# Altium PCB Mez.PcbDoc
Units mm, origin at the board's own origin, x right, y up, seen from the top; angles counter-clockwise.
Board outline 71.75 x 95 mm, 2 copper layers (Top Layer, Bottom Layer); 6 components, 40 nets, 152 pads, 0 vias.
Unrouted connection lines stored in the file: 3.
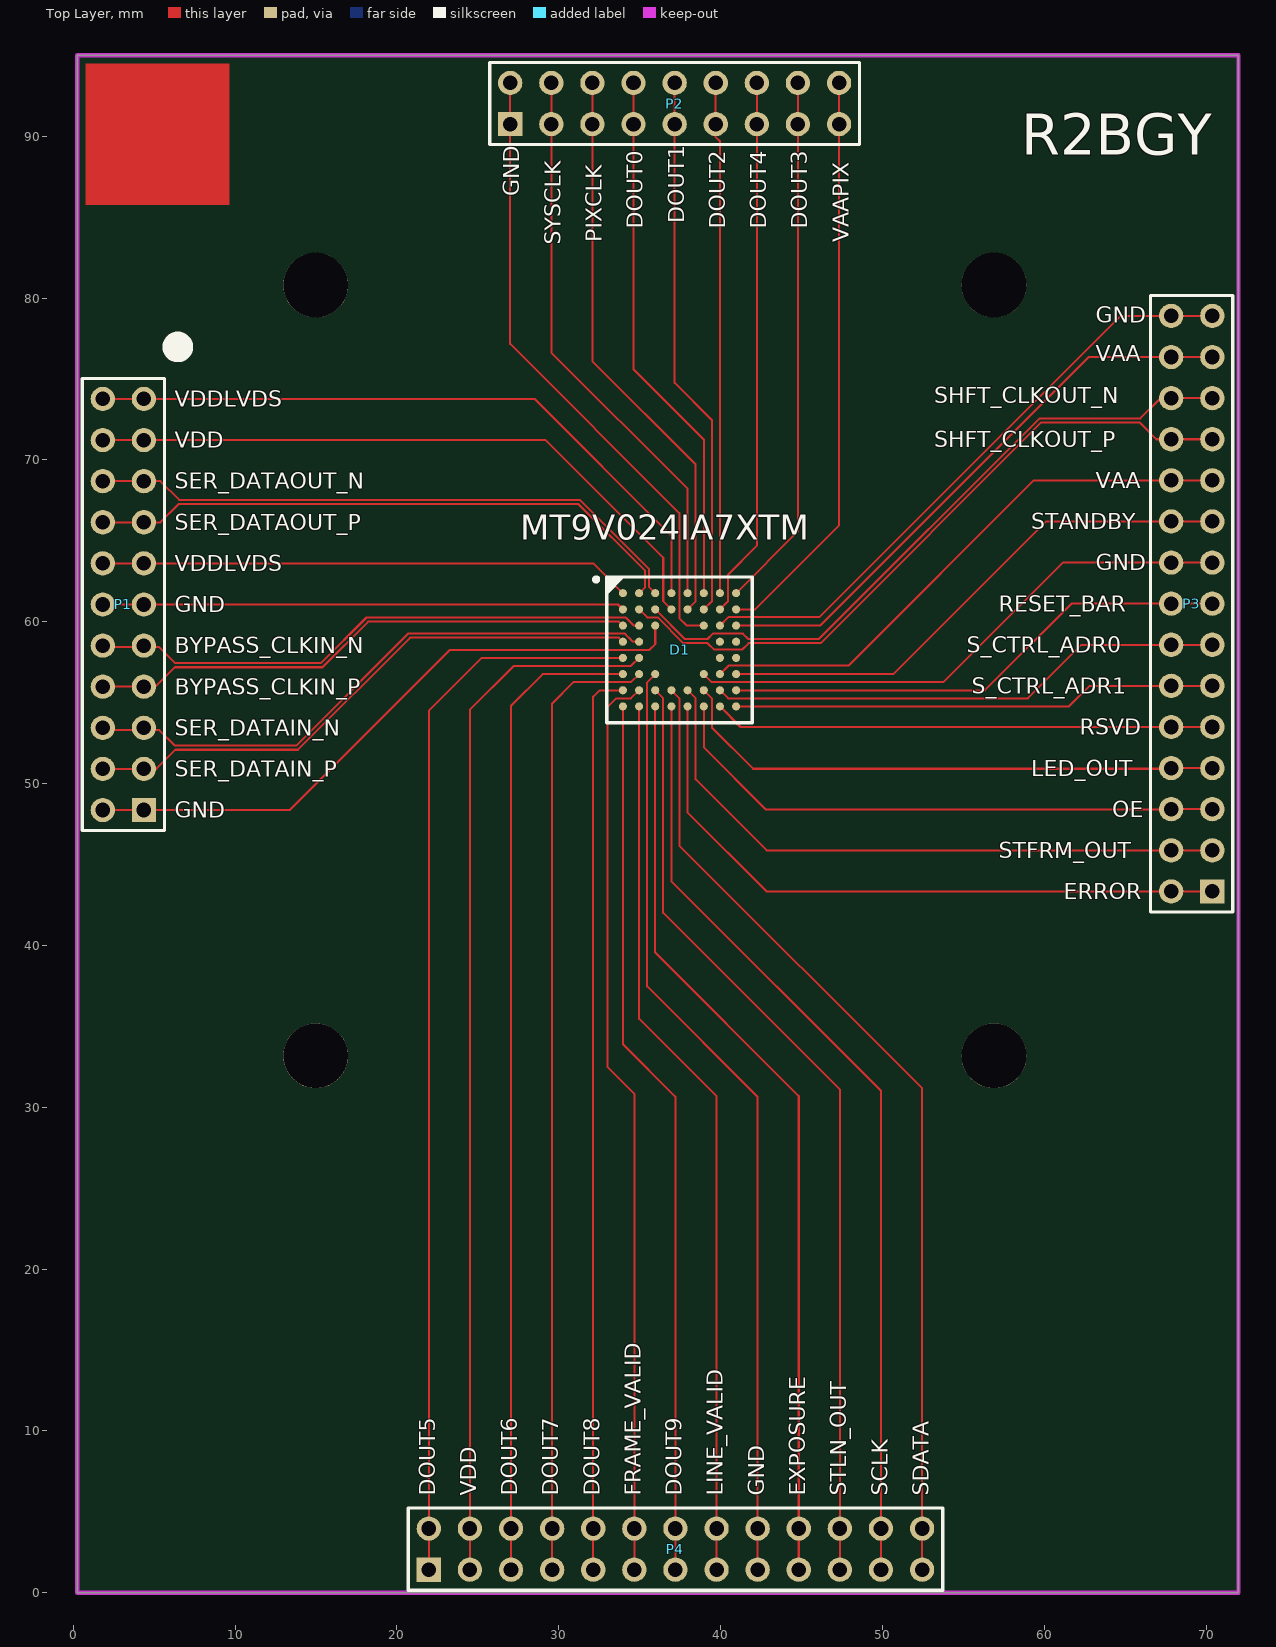
[diagram p0: Top Layer view]
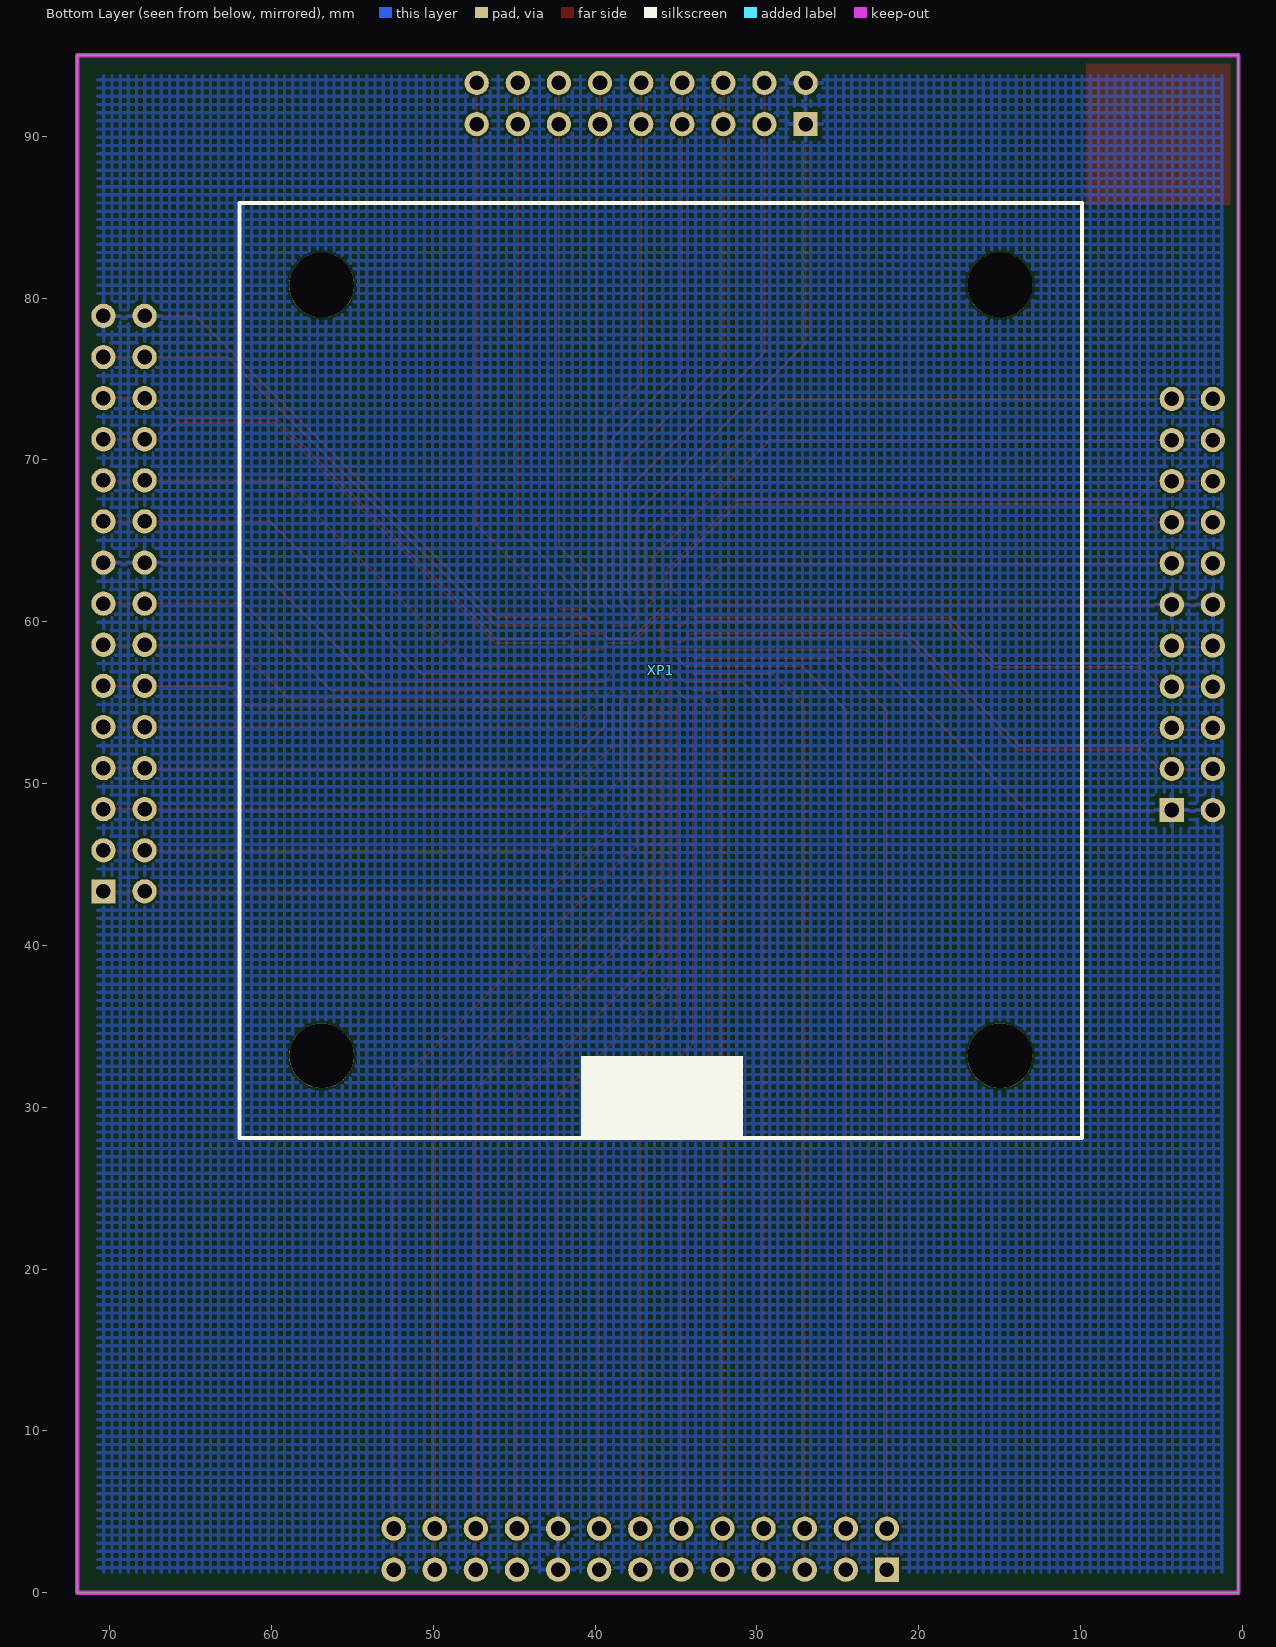
[diagram p1: Bottom Layer view, seen from below]

## Layer stack, top to bottom
Top Solder: solder mask 0.0102, Solder Resist, Dk 3.5
Top Layer: signal copper 0.0356
Dielectric 1: dielectric 0.32, FR-4, Dk 4.8
Bottom Layer: signal copper 0.0356
Bottom Solder: solder mask 0.0102, Solder Resist, Dk 3.5

## Board outline
0.25,0 72,0 72,95 0.25,95

## Design rules (kind name [scope] priority, off if disabled: settings)
Clearance [All] p1: gap=0.125
DiffPairsRouting [All] p1: maxlimit=0.254 minlimit=0.125 mostfreqgap=0.125 toplayer_minwidth=0.125 toplayer_maxwidth=0.381 toplayer_prefwidth=0.127 bottomlayer_minwidth=0.127 bottomlayer_maxwidth=0.381 bottomlayer_prefwidth=0.127 maxuncoupledlength=12.7
PolygonConnect [All] p1: connectstyle=Relief reliefconductorwidth=0.254 reliefentries=4 polygonreliefangle="90 Angle" airgapwidth=0.254
RoutingVias [All] p1: holewidth=0.711 width=1.27 viastyle="Through Hole" minholewidth=0.711 minwidth=1.27 maxholewidth=0.711 maxwidth=1.27
SolderMaskExpansion [All] p1: expansion=0.102
Width [All] p1: maxlimit=5.254 minlimit=0.125 preferedwidth=0.125
28 further rules are at their usual default settings.

## Classes and differential pairs
differential pair SHFT_CLKOUT: +SHFT_CLKOUT_P -SHFT_CLKOUT_N
differential pair SER_DATAOUT: +SER_DATAOUT_P -SER_DATAOUT_N
differential pair SER_DATAIN: +SER_DATAIN_P -SER_DATAIN_N
differential pair BYPASS_CLKIN: +BYPASS_CLKIN_P -BYPASS_CLKIN_N

## Components (designator, comment, footprint, x,y, rotation, side; value= is the part's Value field where it differs from the comment)
D1 "MT9V024IA7XTM" MT9V024IA7XTM 37.462,58.263 r0 top (schematic designator D2)
P1 "Header 11X2" HDR2X11 4.369,48.364 r90 top
P2 "Header 9X2" HDR2X9 27,90.75 r0 top
P3 "Header 15X2" HDR2X15 70.383,43.335 r90 top
P4 "Header 13X2" HDR2X13 21.971,1.426 r0 top
XP1 "Грелка" Грелка 14.986,80.8 r90 bottom

## Footprints (in the part's own frame and the unit in brackets; to place one, negate y for a bottom-side part, rotate by r counter-clockwise, add the part's x,y. Pads: shape width x height; smd on the part's side, far side on the other; paste and mask are expansions set on the pad)
HDR2X9 [mm] "Connector; Header; 9x2 Position"
  rect 1.5x1.5 hole 0.9: 1(0,0)
  round 1.5 hole 0.9: 2(0,2.54) 3(2.54,0) 4(2.54,2.54) 5(5.08,0) 6(5.08,2.54) 7(7.62,0) 8(7.62,2.54) 9(10.16,0) 10(10.16,2.54) 11(12.7,0) 12(12.7,2.54) 13(15.24,0) 14(15.24,2.54) 15(17.78,0) 16(17.78,2.54) 17(20.32,0) 18(20.32,2.54)
  silkscreen extent -1.27,-1.27 21.59,3.81
HDR2X11 [mm] "Connector; Header; 11x2 Position"
  rect 1.5x1.5 hole 0.9: 1(0,0)
  round 1.5 hole 0.9: 2(0,2.54) 3(2.54,0) 4(2.54,2.54) 5(5.08,0) 6(5.08,2.54) 7(7.62,0) 8(7.62,2.54) 9(10.16,0) 10(10.16,2.54) 11(12.7,0) 12(12.7,2.54) 13(15.24,0) 14(15.24,2.54) 15(17.78,0) 16(17.78,2.54) 17(20.32,0) 18(20.32,2.54) 19(22.86,0) 20(22.86,2.54) 21(25.4,0) 22(25.4,2.54)
  silkscreen extent -1.27,-1.27 26.67,3.81
HDR2X13 [mm] "Connector; Header; 13x2 Position"
  rect 1.5x1.5 hole 0.9: 1(0,0)
  round 1.5 hole 0.9: 2(0,2.54) 3(2.54,0) 4(2.54,2.54) 5(5.08,0) 6(5.08,2.54) 7(7.62,0) 8(7.62,2.54) 9(10.16,0) 10(10.16,2.54) 11(12.7,0) 12(12.7,2.54) 13(15.24,0) 14(15.24,2.54) 15(17.78,0) 16(17.78,2.54) 17(20.32,0) 18(20.32,2.54) 19(22.86,0) 20(22.86,2.54) 21(25.4,0) 22(25.4,2.54) 23(27.94,0) 24(27.94,2.54) 25(30.48,0) 26(30.48,2.54)
  silkscreen extent -1.27,-1.27 31.75,3.81
HDR2X15 [mm] "Connector; Header; 15x2 Position"
  rect 1.5x1.5 hole 0.9: 1(0,0)
  round 1.5 hole 0.9: 2(0,2.54) 3(2.54,0) 4(2.54,2.54) 5(5.08,0) 6(5.08,2.54) 7(7.62,0) 8(7.62,2.54) 9(10.16,0) 10(10.16,2.54) 11(12.7,0) 12(12.7,2.54) 13(15.24,0) 14(15.24,2.54) 15(17.78,0) 16(17.78,2.54) 17(20.32,0) 18(20.32,2.54) 19(22.86,0) 20(22.86,2.54) 21(25.4,0) 22(25.4,2.54) 23(27.94,0) 24(27.94,2.54) 25(30.48,0) 26(30.48,2.54) 27(33.02,0) 28(33.02,2.54) 29(35.56,0) 30(35.56,2.54)
  silkscreen extent -1.27,-1.27 36.83,3.81
MT9V024IA7XTM [mm] "BGA, 52-Leads, Body 9,00x9,00mmx0,90mm, Pitch 1,00mm"
  round 0.5 smd: A1(-3.5,3.5) A2(-2.5,3.5) A3(-1.5,3.5) A4(-0.5,3.5) A5(0.5,3.5) A6(1.5,3.5) A7(2.5,3.5) A8(3.5,3.5) B1(-3.5,2.5) B2(-2.5,2.5) B3(-1.5,2.5) B4(-0.5,2.5) B5(0.5,2.5) B6(1.5,2.5) B7(2.5,2.5) B8(3.5,2.5) C1(-3.5,1.5) C2(-2.5,1.5) C3(-1.5,1.5) C6(1.5,1.5) C7(2.5,1.5) C8(3.5,1.5) D1(-3.5,0.5) D2(-2.5,0.5) D7(2.5,0.5) D8(3.5,0.5) E1(-3.5,-0.5) E2(-2.5,-0.5) E7(2.5,-0.5) E8(3.5,-0.5) F1(-3.5,-1.5) F2(-2.5,-1.5) F3(-1.5,-1.5) F6(1.5,-1.5) F7(2.5,-1.5) F8(3.5,-1.5) G1(-3.5,-2.5) G2(-2.5,-2.5) G3(-1.5,-2.5) G4(-0.5,-2.5) G5(0.5,-2.5) G6(1.5,-2.5) G7(2.5,-2.5) G8(3.5,-2.5) H1(-3.5,-3.5) H2(-2.5,-3.5) H3(-1.5,-3.5) H4(-0.5,-3.5) H5(0.5,-3.5) H6(1.5,-3.5) H7(2.5,-3.5) H8(3.5,-3.5)
  silkscreen extent -5.27,-4.5 4.5,4.5, body extent -4.5,-4.5 4.5,4.5, height 0.9
Грелка [mm]
  round 4 hole 4 unplated: 0(-47.625,0) 0(-47.625,41.91) 0(0,0) 0(0,41.91)
  silkscreen extent -52.7,-5.08 5.08,46.99

## Part data
D1: "КМОП матрица WVGA"
P1: "Header, 11-Pin, Dual row"
P2: "Header, 9-Pin, Dual row"
P3: "Header, 15-Pin, Dual row"
P4: "Header, 13-Pin, Dual row"

## Nets (pads, with @x,y where several pads share a name; then routed paths per layer and width w, separated by ;. In a path a pad name is that pad's centre, name@x,y a point inside that pad or via, vN(x,y) a via of type N, cw(c..) or ccw(c..) an arc to the next point about the centre after c; other vN are vias at no path point)
BYPASS_CLKIN_N: D1.C2 P1.9 P1.10 | length 35
  Top Layer w0.127: P1.10 1.929,58.424 5.307,58.424 6.292,57.438 15.3,57.438 18.124,60.262 34.134,60.262 34.632,59.763 D1.C2
BYPASS_CLKIN_P: D1.C1 P1.7 P1.8 | length 33.9
  Top Layer w0.127: P1.8 P1.7 5.08,55.984 6.283,57.186 15.405,57.186 18.228,60.01 33.716,60.01 D1.C1
DOUT0: D1.A6 P2.7 P2.8 | length 33.6
  Top Layer w0.125: P2.8@34.62,93.576 34.62,91.036 34.62,75.6 38.962,71.258 D1.A6
DOUT1: D1.B6 P2.9 P2.10 | length 34
  Top Layer w0.125: P2.10@37.16,93.576 37.16,91.036 37.16,74.76 39.472,72.449 39.472,61.273 D1.B6
DOUT2: D1.A7 P2.11 P2.12 | length 31.9
  Top Layer w0.125: P2.12@39.7,93.576 39.7,91.036 39.7,89.944 39.962,89.682 D1.A7
DOUT3: D1.A8 P2.15 P2.16 | length 33.4
  Top Layer w0.125: D1.A8 44.78,65.581 44.78,91.036 P2.16@44.78,93.576
DOUT4: D1.B7 P2.13 P2.14 | length 33.8
  Top Layer w0.125: D1.B7 40.457,61.258 40.457,62.913 42.24,64.697 42.24,91.036 P2.14@42.24,93.576
DOUT5: D1.E1 P4.1 P4.2 | length 66.4
  Top Layer w0.127: P4.1 21.971,54.503 25.232,57.763 D1.E1
DOUT6: D1.F1 P4.5 P4.6 | length 61.1
  Top Layer w0.125: P4.5 27.051,54.808 29.007,56.763 D1.F1
DOUT7: D1.F2 P4.7 P4.8 | length 59.6
  Top Layer w0.125: P4.7 29.591,54.948 30.907,56.263 34.462,56.263 D1.F2
DOUT8: D1.G1 P4.9 P4.10 | length 55.9
  Top Layer w0.125: P4.9 32.131,55.363 32.532,55.763 D1.G1
DOUT9: D1.H1 P4.13 P4.14 | length 54.7
  Top Layer w0.125: D1.H1 33.962,33.908 37.211,30.659 P4.13
ERROR: D1.H5 P3.1 P3.2 | length 41
  Top Layer w0.125: D1.H5 37.962,48.208 42.836,43.335 P3.1
EXPOSURE: D1.H3 P4.19 P4.20 | length 57
  Top Layer w0.125: D1.H3 35.962,39.558 44.831,30.689 P4.19
FRAME_VALID: D1.G2 P4.11 P4.12 | length 56.4
  Top Layer w0.125: P4.11 34.671,30.824 33.007,32.488 33.007,54.713 33.557,55.263 34.462,55.263 D1.G2
GND: D1.B1 D1.C3 D1.C6 D1.C7 D1.F3 D1.F6 P1.1 P1.2 P1.11 P1.12 P2.1 P2.2 P3.17 P3.18 P3.29 P3.30 P4.17 P4.18 | length 242.6
  Top Layer w0.125: P2.2@27,93.576 27,77.17 37.457,66.713 37.457,60.213 37.907,59.763 D1.C6 ; D1.F3 35.457,56.258 35.457,37.463 42.291,30.629 P4.17 ; D1.F6 39.462,56.263 53.757,56.263 61.148,63.655 P3.17 ; D1.C7 40.475,60.276 46.101,60.276 64.719,78.895 P3.29
  Top Layer w0.127: P1.2 13.382,48.364 23.282,58.263 35.607,58.263 35.962,58.619 D1.C3 ; P1.12 33.662,61.064 D1.B1
LED_OUT: D1.G6 P3.7 P3.8 | length 34.2
  Top Layer w0.125: D1.G6 39.457,55.269 39.457,53.463 42.007,50.913 P3.8@67.592,50.913 ; P3.8 P3.7
LINE_VALID: D1.H2 P4.15 P4.16 | length 55.3
  Top Layer w0.125: D1.H2 34.962,35.458 39.751,30.669 P4.15
OE: D1.H6 P3.5 P3.6 | length 35.3
  Top Layer w0.125: D1.H6 38.962,52.233 42.807,48.388 P3.6@67.592,48.388 ; P3.6 P3.5
PIXCLK: D1.B5 P2.5 P2.6 | length 35.7
  Top Layer w0.125: P2.6@32.08,93.576 32.08,91.036 32.08,76.09 38.457,69.713 38.457,61.258 D1.B5
RESET_BAR: D1.G8 P3.15 P3.16 | length 31.6
  Top Layer w0.125: D1.G8 56.332,55.763 61.683,61.115 P3.15
RSVD: D1.H7 P3.9 P3.10 | length 30.9
  Top Layer w0.125: D1.H7 41.231,53.495 P3.10 P3.9
S_CTRL_ADR0: D1.G7 P3.13 P3.14 | length 32
  Top Layer w0.125: D1.G7 40.462,55.263 58.982,55.263 62.293,58.575 P3.13
S_CTRL_ADR1: D1.H8 P3.11 P3.12 | length 29.9
  Top Layer w0.125: D1.H8 61.532,54.763 62.803,56.035 P3.11
SCLK: D1.H4 P4.23 P4.24 | length 58.7
  Top Layer w0.125: D1.H4 36.962,43.958 49.911,31.009 P4.23
SDATA: D1.G4 P4.25 P4.26 | length 60.8
  Top Layer w0.125: D1.G4 37.457,55.269 37.457,46.163 52.451,31.169 P4.25
SER_DATAIN_N: D1.D2 P1.5 P1.6 | length 36.7
  Top Layer w0.127: P1.6 1.974,53.299 5.327,53.299 6.287,52.338 13.775,52.338 20.708,59.271 34.074,59.271 34.143,59.202 34.401,58.945 ; 34.401,58.944 34.582,58.763 D1.D2
SER_DATAIN_P: D1.D1 P1.3 P1.4 | length 35.6
  Top Layer w0.127: P1.4 P1.3 5.131,50.904 6.313,52.086 13.88,52.086 20.812,59.019 33.706,59.019 D1.D1
SER_DATAOUT_N: D1.A3 P1.17 P1.18 | length 37.6
  Top Layer w0.127: P1.18 5.385,68.684 6.543,67.526 31.304,67.526 35.588,63.241 35.588,62.137 D1.A3
SER_DATAOUT_P: D1.A2 P1.15 P1.16 | length 37.2
  Top Layer w0.127: P1.16 P1.15 5.385,66.144 6.515,67.274 31.199,67.274 35.336,63.137 35.336,62.137 D1.A2
SHFT_CLKOUT_N: D1.B3 P3.25 P3.26 | length 41.6
  Top Layer w0.127: D1.B3 37.795,58.93 39.192,58.93 39.522,59.26 41.377,59.26 41.707,58.93 46.076,58.93 59.713,72.568 65.936,72.568 67.183,73.815 P3.26 P3.25
SHFT_CLKOUT_P: D1.B2 P3.23 P3.24 | length 42.7
  Top Layer w0.127: D1.B2 35.462,60.263 36.106,60.263 37.691,58.678 39.19,58.678 39.599,58.27 41.326,58.27 41.734,58.678 46.18,58.678 59.818,72.316 65.888,72.316 66.929,71.275 P3.24 P3.23
STANDBY: D1.F8 P3.19 P3.20 | length 33.3
  Top Layer w0.125: D1.F8 50.682,56.763 60.113,66.195 P3.19
STFRM_OUT: D1.G5 P3.3 P3.4 | length 39.4
  Top Layer w0.125: D1.G5 38.457,55.269 38.457,50.263 42.846,45.875 P3.4 P3.3
STLN_OUT: D1.G3 P4.21 P4.22 | length 59.1
  Top Layer w0.125: D1.G3 36.457,55.269 36.457,42.013 47.371,31.099 P4.21
SYSCLK: D1.A5 P2.3 P2.4 | length 35.3
  Top Layer w0.125: P2.4@29.54,93.576 29.54,91.036 29.54,76.63 37.962,68.208 D1.A5
VAA: D1.C8 D1.F7 P3.21 P3.22 P3.27 P3.28 | length 71.7
  Top Layer w0.125: D1.F7 40.487,57.288 47.907,57.288 59.353,68.735 P3.21 ; D1.C8 46.147,59.763 62.738,76.355 P3.27
VAAPIX: D1.B8 P2.17 P2.18 | length 36.1
  Top Layer w0.125: D1.B8 42.132,60.763 47.32,65.952 47.32,91.036 P2.18@47.32,93.576
VDD: D1.B4 D1.E2 P1.19 P1.20 P4.3 P4.4 | length 106
  Top Layer w0.125: P1.20 29.196,71.224 36.458,63.962 36.458,61.268 D1.B4 ; P4.3 24.511,54.568 27.207,57.263 34.462,57.263 D1.E2
VDDLVDS: D1.A1 D1.A4 P1.13 P1.14 P1.21 P1.22 | length 75.1
  Top Layer w0.127: P1.14 32.122,63.604 D1.A1 ; P1.22 28.506,73.764 36.962,65.308 D1.A4
pads on no net: D1.D7 D1.D8 D1.E7 D1.E8 XP1.0

## Polygon pours and split planes (outlines as drawn)
GND on Bottom Layer "Top Overlay-No Net" (hatched 90Degree grid 0.508 track 0.203, remove dead copper, pour order 3): 1.25,1.25 70.75,1.25 70.75,93.75 1.25,93.75

## Keep-outs
Keep-Out Layer:
  the board outline again, w0.254

## Other copper
Top Layer:
  rectangle: 0.75,85.737 9.665,94.5

## Silkscreen, mask and mechanical layers (free items; w line width, h text height)
Top Overlay:
  circle w1.27: c6.46,76.977 r0.309
  text "R2BGY" at 58.583,88.841 h2.52
  text "GND" at 27.575,86.293 h1 r90
  text "DOUT1" at 37.741,84.627 h1 r90
  text "DOUT0" at 35.2,84.294 h1 r90
  text "DOUT2" at 40.283,84.294 h1 r90
  text "DOUT4" at 42.825,84.294 h1 r90
  text "DOUT3" at 45.366,84.294 h1 r90
  text "PIXCLK" at 32.658,83.461 h1 r90
  text "VAAPIX" at 47.908,83.461 h1 r90
  text "SYSCLK" at 30.116,83.294 h1 r90
  text "GND" at 63.195,78.488 h1
  text "VAA" at 63.195,76.101 h1
  text "SHFT_CLKOUT_N" at 53.198,73.484 h1
  text "VDDLVDS" at 6.28,73.288 h1
  text "SHFT_CLKOUT_P" at 53.198,70.767 h1
  text "VDD" at 6.28,70.747 h1
  text "VAA" at 63.195,68.255 h1
  text "SER_DATAOUT_N" at 6.28,68.205 h1
  text "STANDBY" at 59.196,65.713 h1
  text "SER_DATAOUT_P" at 6.28,65.663 h1
  text "MT9V024IA7XTM" at 27.628,65.077 h1.52
  text "GND" at 63.195,63.172 h1
  text "VDDLVDS" at 6.28,63.122 h1
  text "RESET_BAR" at 57.197,60.63 h1
  text "GND" at 6.28,60.58 h1
  text "S_CTRL_ADR0" at 55.198,58.088 h1
  text "BYPASS_CLKIN_N" at 6.28,58.038 h1
  text "S_CTRL_ADR1" at 55.531,55.547 h1
  text "BYPASS_CLKIN_P" at 6.28,55.497 h1
  text "RSVD" at 62.196,53.005 h1
  text "SER_DATAIN_N" at 6.28,52.955 h1
  text "LED_OUT" at 59.196,50.463 h1
  text "SER_DATAIN_P" at 6.28,50.413 h1
  text "OE" at 64.195,47.922 h1
  text "GND" at 6.28,47.872 h1
  text "STFRM_OUT" at 57.197,45.38 h1
  text "ERROR" at 61.196,42.838 h1
  text "DOUT5" at 22.357,6.004 h1 r90
  text "VDD" at 24.898,6.004 h1 r90
  text "DOUT6" at 27.44,6.004 h1 r90
  text "DOUT7" at 29.982,6.004 h1 r90
  text "DOUT8" at 32.523,6.004 h1 r90
  text "FRAME_VALID" at 35.065,6.004 h1 r90
  text "DOUT9" at 37.607,6.004 h1 r90
  text "LINE_VALID" at 40.148,6.004 h1 r90
  text "GND" at 42.69,6.004 h1 r90
  text "EXPOSURE" at 45.232,6.004 h1 r90
  text "STLN_OUT" at 47.773,6.004 h1 r90
  text "SCLK" at 50.315,6.004 h1 r90
  text "SDATA" at 52.857,6.004 h1 r90